# EAGLE board core_bak (EAGLE 6.4)
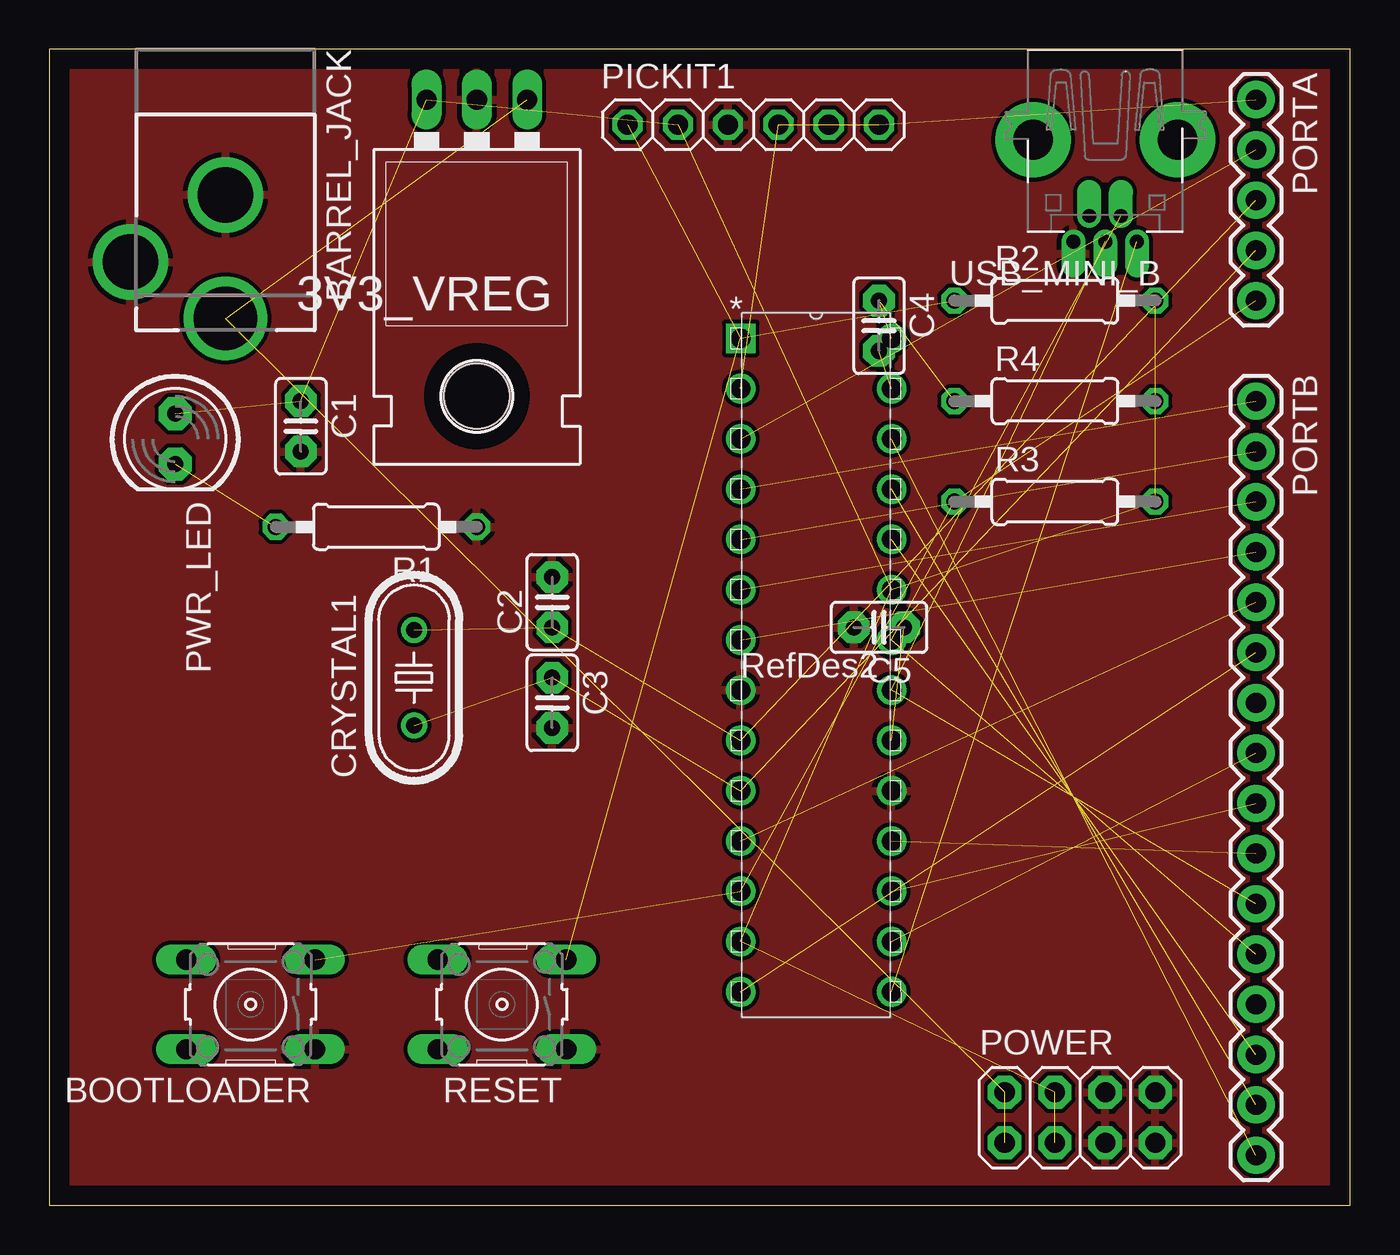
[diagram p0: board, top side]
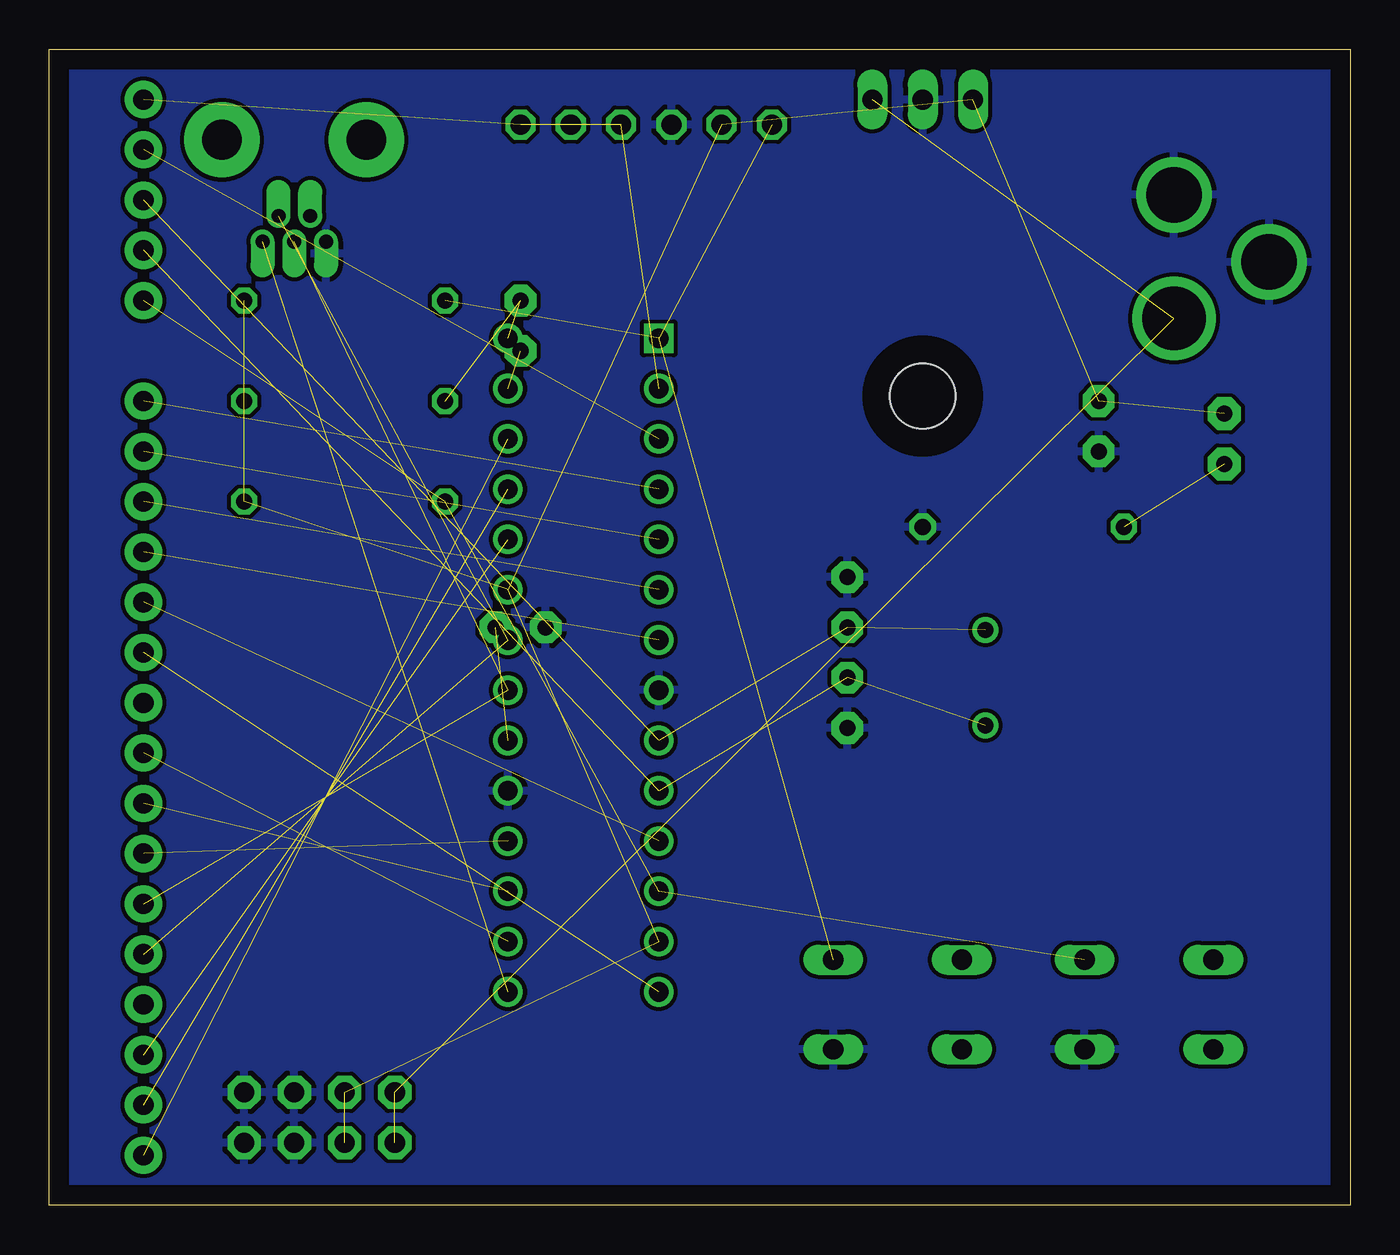
[diagram p1: board, bottom side, seen from below]

Size 65.71 x 58.41 mm. Coordinates in mm from the lower left corner, seen from the top.
Outline: 0,0 65.71,0 65.71,58.41 0,58.41 0,0
Copper layers (1*16): Top 0.035mm / dielectric 1.5mm / Bottom 0.035mm
Design rules "default": minimum track width 10mil, minimum drill 24mil, track to track 8mil, track to pad 8mil, pad to pad 8mil, via to via 8mil, smd to smd 8mil, copper to edge 40mil, drill to drill 8mil, minimum pad ring 10mil, minimum via ring 8mil, stop-mask expansion 4mil, vias tented up to drill 0mil, thermal gap 10mil

## Footprints (pad centres in the part's own frame; a part is rotated, then mirrored left to right if it is on the bottom)
TO-220-ALT = drill 1.016 long: GND 0,-3.81; IN -2.54,-3.81; OUT 2.54,-3.81 | hole 3.302: 0,11.176
DCJACK_2MM_PTH = drill 2.8: GND 0,7.35; GNDBREAK 4.8,10.75 | drill 3.2: PWR 0,13.6
B3F-10XX = drill 1.016 long: 1 -3.251,2.261; 2 3.251,2.261; 3 -3.251,-2.261; 4 3.251,-2.261
C2.5-2 = drill 0.813 pad 1.6 octagon: 1 -1.27,0; 2 1.27,0
HC49U-V = drill 0.813: 1 -2.413,0; 2 2.413,0
1X06 = drill 1.016 octagon: 1 -6.35,0; 2 -3.81,0; 3 -1.27,0; 4 1.27,0; 5 3.81,0; 6 6.35,0
1X05 = drill 1.016 pad 1.88: 1 0,0; 2 2.54,0; 3 5.08,0; 4 7.62,0; 5 10.16,0
1X16 = drill 1.016 pad 1.88: 1 0,0; 2 2.54,0; 3 5.08,0; 4 7.62,0; 5 10.16,0; 6 12.7,0; 7 15.24,0; 8 17.78,0; 9 20.32,0; 10 22.86,0; 11 25.4,0; 12 27.94,0; 13 30.48,0; 14 33.02,0; 15 35.56,0; 16 38.1,0
2X04 = drill 1.016 pad 1.676 octagon: 1 -3.81,-1.27; 2 -3.81,1.27; 3 -1.27,-1.27; 4 -1.27,1.27; 5 1.27,-1.27; 6 1.27,1.27; 7 3.81,-1.27; 8 3.81,1.27
LED5MM = drill 0.813 pad 1.676 octagon: A -1.27,0; K 1.27,0
0207/10 = drill 0.813 octagon: 1 -5.08,0; 2 5.08,0
SPDIP28_300MC = drill 0.991 square: 1 -7.62,33.02 | drill 0.991: 2 -7.62,30.48; 3 -7.62,27.94; 4 -7.62,25.4; 5 -7.62,22.86; 6 -7.62,20.32; 7 -7.62,17.78; 8 -7.62,15.24; 9 -7.62,12.7; 10 -7.62,10.16; 11 -7.62,7.62; 12 -7.62,5.08; 13 -7.62,2.54; 14 -7.62,0; 15 0,0; 16 0,2.54; 17 0,5.08; 18 0,7.62; 19 0,10.16; 20 0,12.7; 21 0,15.24; 22 0,17.78; 23 0,20.32; 24 0,22.86; 25 0,25.4; 26 0,27.94; 27 0,30.48; 28 0,33.02
USB-MINIB-THM-MOLEX = drill 0.7 offset: D+ 0,9.72; D- -0.8,8.42; GND 1.6,9.72; ID 0.8,8.42; VBUS -1.6,9.72 | drill 2 pad 3.81: GND1 -3.65,4.57; GND4 3.65,4.57

## Placement (x,y rotation side)
3V3_VREG  3.3  [TO-220-ALT]  21.59,52.07 180 top
BARREL_JACK  [DCJACK_2MM_PTH]  8.89,58.42 180 top
BOOTLOADER  [B3F-10XX]  10.16,10.16 180 top
C1  .1uF  [C2.5-2]  12.7,39.37 270 top
C2  22pF  [C2.5-2]  25.4,30.48 90 top
C3  22pF  [C2.5-2]  25.4,25.4 270 top
C4  .1uF  [C2.5-2]  41.91,44.45 270 top
C5  .1uF  [C2.5-2]  41.91,29.21 180 top
CRYSTAL1  20M  [HC49U-V]  18.41,26.67 90 top
PICKIT1  [1X06]  35.56,54.61 0 top
PORTA  [1X05]  60.96,55.88 270 top
PORTB  M16PTH  [1X16]  60.96,40.64 270 top
POWER  [2X04]  52.07,4.45 0 top
PWR_LED  [LED5MM]  6.35,38.73 270 top
R1  47  [0207/10]  16.51,34.29 180 top
R2  10K  [0207/10]  50.8,45.72 0 top
R3  10K  [0207/10]  50.8,35.56 0 top
R4  10K  [0207/10]  50.8,40.64 0 top
RESET  [B3F-10XX]  22.86,10.16 180 top
U1  PIC32MX230F064B-  [SPDIP28_300MC]  42.55,10.79 0 top
USB_MINI_B  [USB-MINIB-THM-MOLEX]  53.34,58.42 180 top

## Library data of the parts
3V3_VREG = SparkFun-PowerIC
BARREL_JACK PICKIT1 POWER PWR_LED USB_MINI_B = adafruit
BOOTLOADER RESET = switch-omron; MPN: B3F-1000; OC_FARNELL: 176432; OC_NEWARK: 36M3542
C1-C5 = capacitor-wima
CRYSTAL1 = crystal; OC_FARNELL: 1666969; OC_NEWARK: unknown
PORTA PORTB = SparkFun-Connectors
R1-R4 = resistor
U1 = uSensor

## Nets
+3V3: 3V3_VREG.OUT C1.1 PICKIT1.2 POWER.3 POWER.4 PWR_LED.A R2.2 R3.2 R4.2 U1.13 U1.23
+5V: 3V3_VREG.IN BARREL_JACK.PWR POWER.1 POWER.2
AVDD: C4.1 R4.1 U1.28
AVSS: C4.2 U1.27
D+: PORTB.11 U1.21 USB_MINI_B.D+
D-: PORTB.12 U1.22 USB_MINI_B.D-
GND: 3V3_VREG.GND BARREL_JACK.GND BARREL_JACK.GNDBREAK BOOTLOADER.1 C1.2 C2.2 C3.2 C5.2 PICKIT1.3 POWER.5 POWER.6 POWER.7 POWER.8 R1.1 RESET.1 U1.8 U1.19 USB_MINI_B.GND
MCLR: PICKIT1.1 R2.1 RESET.3 U1.1
N$5: PWR_LED.K R1.2
OSC1: C2.1 CRYSTAL1.2 PORTA.3 U1.9
OSC2: C3.1 CRYSTAL1.1 PORTA.4 U1.10
RA0: PICKIT1.4 PICKIT1.5 PICKIT1.6 PORTA.1 U1.2
RA1: PORTA.2 U1.3
RA4: BOOTLOADER.3 PORTA.5 R3.1 U1.12
RB0: PORTB.1 U1.4
RB1: PORTB.2 U1.5
RB2: PORTB.3 U1.6
RB3: PORTB.4 U1.7
RB4: PORTB.5 U1.11
RB5: PORTB.6 U1.14
RB7: PORTB.8 U1.16
RB8: PORTB.9 U1.17
RB9: PORTB.10 U1.18
RB13: PORTB.14 U1.24
RB14: PORTB.15 U1.25
RB15: PORTB.16 U1.26
VBUS: U1.15 USB_MINI_B.VBUS
VCAP: C5.1 U1.20

## Tracks (layer width: path | path; a pad name or v marks a point on that pad's centre or on a via)
+3V3  (10 unrouted)
+5V  (3 unrouted)
AVDD  (2 unrouted)
AVSS  (1 unrouted)
D+  (2 unrouted)
D-  (2 unrouted)
GND
  pour Top: -3.81,60.96 -3.81,-3.81 69.85,-3.81 69.85,60.96
  pour Bottom: -7.62,67.31 -7.62,-17.78 87,-17.78 87,-13.34 87,69.85 -7.62,69.85
MCLR  (3 unrouted)
N$5  (1 unrouted)
OSC1  (3 unrouted)
OSC2  (3 unrouted)
RA0  (4 unrouted)
RA1  (1 unrouted)
RA4  (3 unrouted)
RB0  (1 unrouted)
RB1  (1 unrouted)
RB2  (1 unrouted)
RB3  (1 unrouted)
RB4  (1 unrouted)
RB5  (1 unrouted)
RB7  (1 unrouted)
RB8  (1 unrouted)
RB9  (1 unrouted)
RB13  (1 unrouted)
RB14  (1 unrouted)
RB15  (1 unrouted)
VBUS  (1 unrouted)
VCAP  (1 unrouted)